# Altium PCB LC_LPF7.PcbDoc
Units mil, origin at the board's own origin, x right, y up, seen from the top; angles counter-clockwise.
Board outline 4145 x 1480 mil, 2 copper layers (Top Layer, Bottom Layer); 4 components, 3 nets, 8 pads, 1 vias.
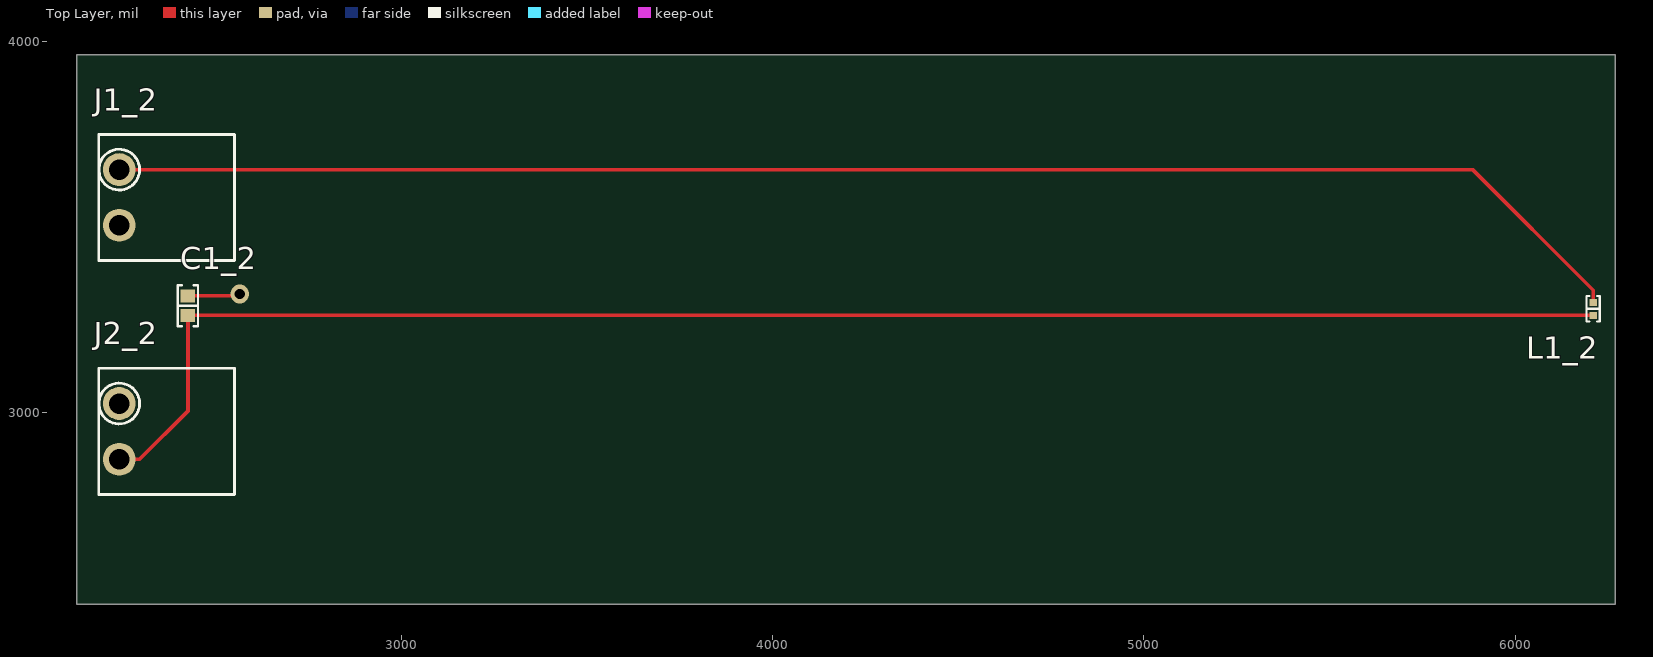
[diagram p0: Top Layer view]
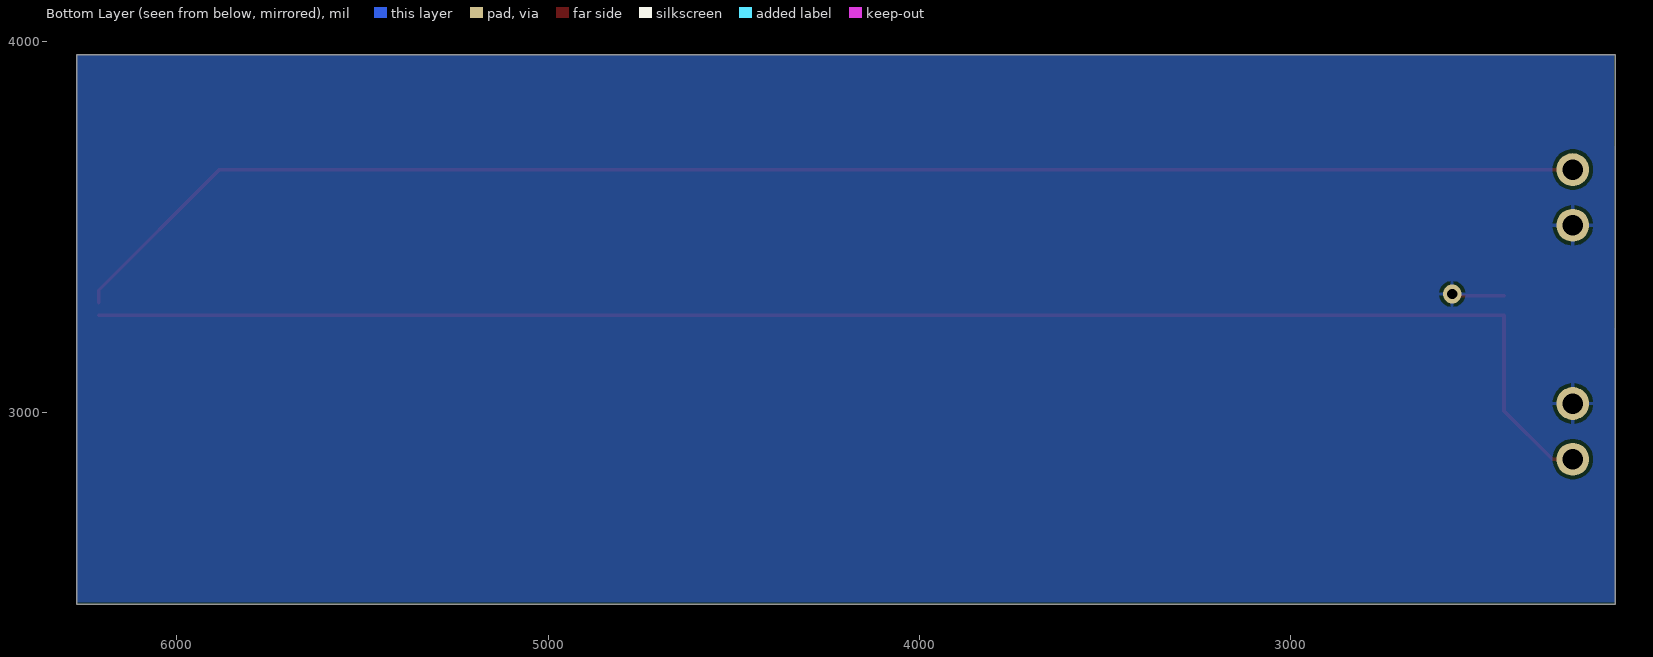
[diagram p1: Bottom Layer view, seen from below]
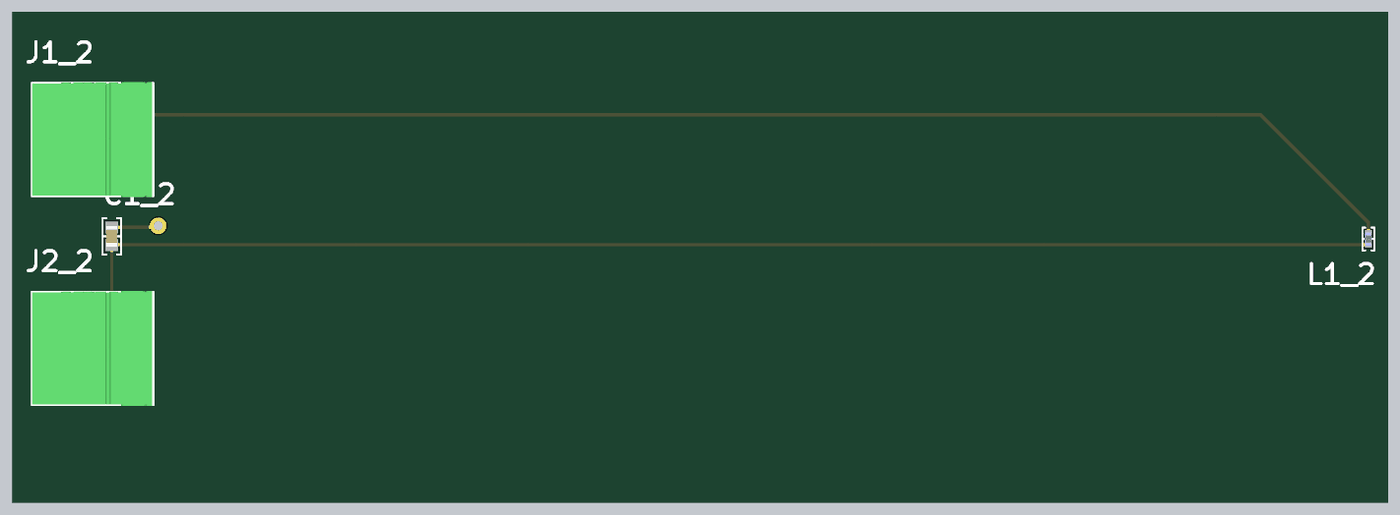
[diagram p2: 3D render of the assembled board from above, using the file's embedded part models]

## Layer stack, top to bottom
Top Solder: solder mask 0.4, Solder Resist, Dk 3.5
Top Layer: signal copper 1.4
Dielectric 1: dielectric 12.6, FR-4, Dk 4.8
Bottom Layer: signal copper 1.4
Bottom Solder: solder mask 0.4, Solder Resist, Dk 3.5

## Board outline
2125,2485 6270,2485 6270,3965 2125,3965

## Design rules (kind name [scope] priority, off if disabled: settings)
Clearance [All] p1: gap=10 ignorepadtopadclearanceinfootprint=FALSE except(0: Arc-Hole Track-Hole SMDPad-Hole THPad-Hole Via-Hole Fill-Hole Poly-Hole Region-Hole Text-Hole)
PolygonConnect [All] p1: connectstyle=Relief reliefconductorwidth=10 reliefentries=4 polygonreliefangle="90 Angle" airgapwidth=10
RoutingVias [All] p1: holewidth=28 width=50 viastyle="Through Hole" minholewidth=28 minwidth=50 maxholewidth=28 maxwidth=50
SolderMaskExpansion [All] p1: expansion=4 istentingtop=FALSE
Width [All] p1: maxlimit=10 minlimit=10 preferedwidth=10
30 further rules are at their usual default settings.

## Components (designator, comment, footprint, x,y, rotation, side; value= is the part's Value field where it differs from the comment)
C1_2 "2700 pF" "CAP 0603_1608" 2425,3288.43 r270 top
J1_2 "OQ0232510000G" "FCI 06-381-2PIN" 2370,3580 r270 top
J2_2 "OQ0232510000G" "FCI 06-381-2PIN" 2370,2950 r270 top
L1_2 "160 nH" "IND 0402_1005 RF WW" 6210,3280 r270 top

## Footprints (in the part's own frame and the unit in brackets; to place one, negate y for a bottom-side part, rotate by r counter-clockwise, add the part's x,y. Pads: shape width x height; smd on the part's side, far side on the other; paste and mask are expansions set on the pad)
"CAP 0603_1608" [mm] "Chip Capacitor, 2-Leads, Body 1.60x0.80mm, IPC Medium Density"
  rect 0.9x1 smd: 1(-0.675,0) 2(0.675,0)
  silkscreen extent -1.4,-0.7 1.4,0.7, body extent -0.8,-0.41 0.8,0.41, height 0.82
"FCI 06-381-2PIN" [mm] "FCI Pluggable Terminal Block"
  round 2.25 hole 1.4: 1(-1.905,-3.302) 2(1.905,-3.302)
  silkscreen extent -4.32,-4.7 4.32,4.57, body extent -4.4,-4.7 4.4,4.5, height 7.6
"IND 0402_1005 RF WW" [mm] "Chip Inductor, 2-Leads, Body 1.00x0.50mm, IPC High Density"
  rect 0.48x0.54 smd: 1(-0.44,0) 2(0.44,0)
  silkscreen extent -0.87,-0.45 0.87,0.45, body extent -0.5,-0.29 0.5,0.29, height 0.51

## Part data
C1_2: library part C0603C272F3GAC7867, "CAP CER 2700PF 25V NP0 0603", Device Package="0603 (1608 Metric)", Manufacturer=KEMET, Operating Temperature="-55°C ~ 125°C", Supplier Part Number 1=399-17403-1-ND, Temperature Coefficient="C0G, NP0", Tolerance=±1%, Voltage - Rated=25V, Applications="General Purpose", Capacitance="2700 pF", ComponentLink1Description=Datasheet, ComponentLink1URL=https://api.kemet.com/component-edge/download/datasheet/C0603C272F3GACTU.pdf, ComponentLink2Description="DigiKey Link", ComponentLink2URL=https://www.digikey.com/en/products/detail/kemet/C0603C272F3GAC7867/2200413, Features="Low ESL", lastupdated="03/09/2023 19:08:49", Lifecycle Status=Active, Minimum Order=1, Mounting Type="Surface Mount, MLCC", Package / Case="0603 (1608 Metric)", Packaging=TapeAndReel, Part Number=C0603C272F3GAC7867, Part Status=Active, PartId=2138, price=0.40, Series="SMD Comm C0G", Size / Dimension="0.063\" L x 0.031\" W (1.60mm x 0.80mm)", Supplier 1=DigiKey, Thickness (Max)="0.034\" (0.87mm)"
J1_2 J2_2: "TERM BLOCK HDR 2POS 90DEG 3.81MM", Color=Green, Current - UL=10A, Manufacturer="Amphenol Anytek", Operating Temperature="-40°C ~ 115°C", Supplier Part Number 1=609-3819-ND, Voltage - UL=300V, ComponentLink1Description=Datasheet, ComponentLink1URL=http://portal.fciconnect.com/Comergent//fci/drawing/oqxx32x100j0g.pdf, ComponentLink2Description="DigiKey Link", ComponentLink2URL=//digikey.com/product-detail/en/amphenol-anytek/OQ0232510000G/609-3819-ND/2261255, Contact Mating Finish=Tin, Header Orientation="90°, Right Angle", lastupdated="16/12/2019 19:14:30", Lifecycle Status=0, Minimum Order=1, Mounting Type="Through Hole", Number of Levels=1, Number of Positions=2, Packaging=Bulk, Part Number=OQ0232510000G, Part Status=Active, Pitch="0.150\" (3.81mm)", Positions Per Level=2, price=0.49, Series=06-381, Supplier 1=DigiKey, Termination Style=Solder, Type="Header, Male Pins, Shrouded (4 Side)"
L1_2: library part LQW15CNR16J00D, "FIXED IND 160NH 480MA 330MOHM SM", Current Rating (Amps)="480 mA", DC Resistance (DCR)="330mOhm Max", Device Package="0402 (1005 Metric)", Frequency - Self Resonant=900MHz, Inductance Frequency - Test="100 MHz", Manufacturer="Murata Electronics", Operating Temperature="-55°C ~ 125°C", Supplier Part Number 1=490-14716-1-ND, Tolerance=±5%, ComponentLink1Description=Datasheet, ComponentLink1URL=https://search.murata.co.jp/Ceramy/image/img/P02/JELF243A-0087.pdf, ComponentLink2Description="DigiKey Link", ComponentLink2URL=https://www.digikey.com/en/products/detail/murata-electronics/LQW15CNR16J00D/4359664, Height - Seated (Max)="0.024\" (0.60mm)", Inductance="160 nH", lastupdated="03/09/2023 20:25:06", Lifecycle Status=Active, Material - Core=Ferrite, Minimum Order=1, Mounting Type="Surface Mount", Package / Case="0402 (1005 Metric)", Packaging=TapeAndReel, Part Number=LQW15CNR16J00D, Part Status=Active, PartId=1, price=0.19, Series=LQW15, Shielding=Unshielded, Size / Dimension="0.039\" L x 0.024\" W (1.00mm x 0.60mm)", Supplier 1=DigiKey, Type="Drum Core, Wirewound"

## Via types
v1: diameter 50, hole 28, Top Layer to Bottom Layer, 1 vias

## Nets (pads, with @x,y where several pads share a name; then routed paths per layer and width w, separated by ;. In a path a pad name is that pad's centre, name@x,y a point inside that pad or via, vN(x,y) a via of type N, cw(c..) or ccw(c..) an arc to the next point about the centre after c; other vN are vias at no path point)
GND: C1_2.1 J1_2.2 J2_2.1 | length 135
  Top Layer w10: C1_2.1 v1@2560,3315
  other v1: 2565,3320
NetC1_2_2: C1_2.2 J2_2.2 L1_2.2 | length 4281
  Top Layer w10: J2_2.2 2295,2875 2425,3005 C1_2.2 2425.83,3262.68 L1_2.2
NetJ1_2_1: J1_2.1 L1_2.1 | length 4137.3
  Top Layer w10: J1_2.1 5885,3655 6210,3330 L1_2.1

## Polygon pours and split planes (outlines as drawn)
GND on Bottom Layer "GND_L02_P000" (solid, pour order 0): 2130,3965 6270,3965 6270,2490 2125,2490